# Altium PCB FuzzyWasp-2.PcbDoc
Units mil, origin at the board's own origin, x right, y up, seen from the top; angles counter-clockwise.
Board outline 3346.46 x 3346.46 mil, 2 copper layers (Top Layer, Bottom Layer), stack 12.8 mil thick; 93 components, 75 nets, 320 pads, 156 vias.
Unrouted connection lines stored in the file: 3.
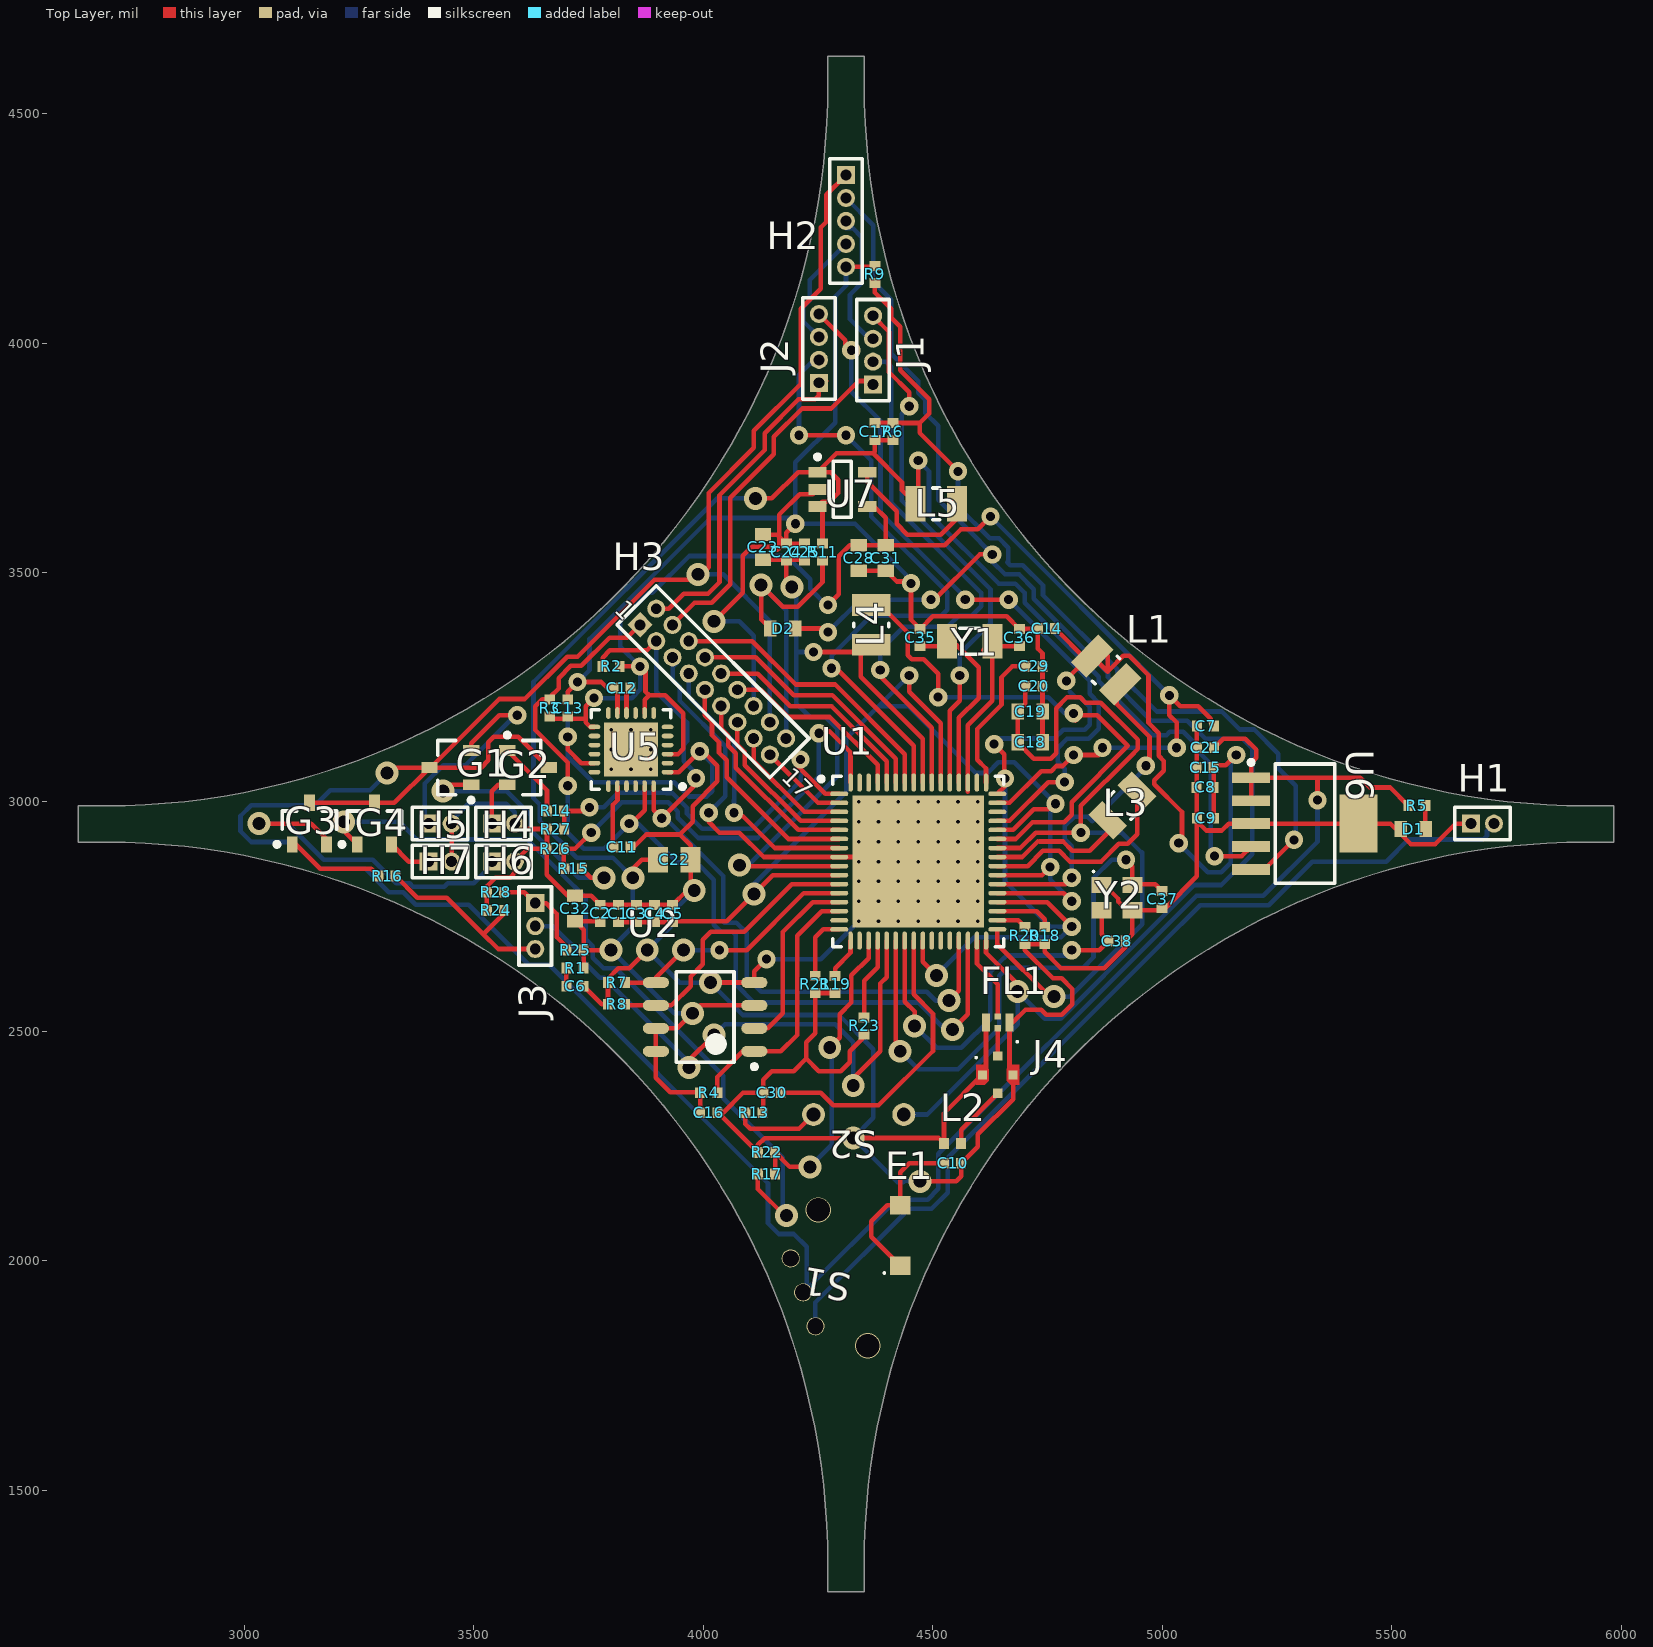
[diagram p0: Top Layer view]
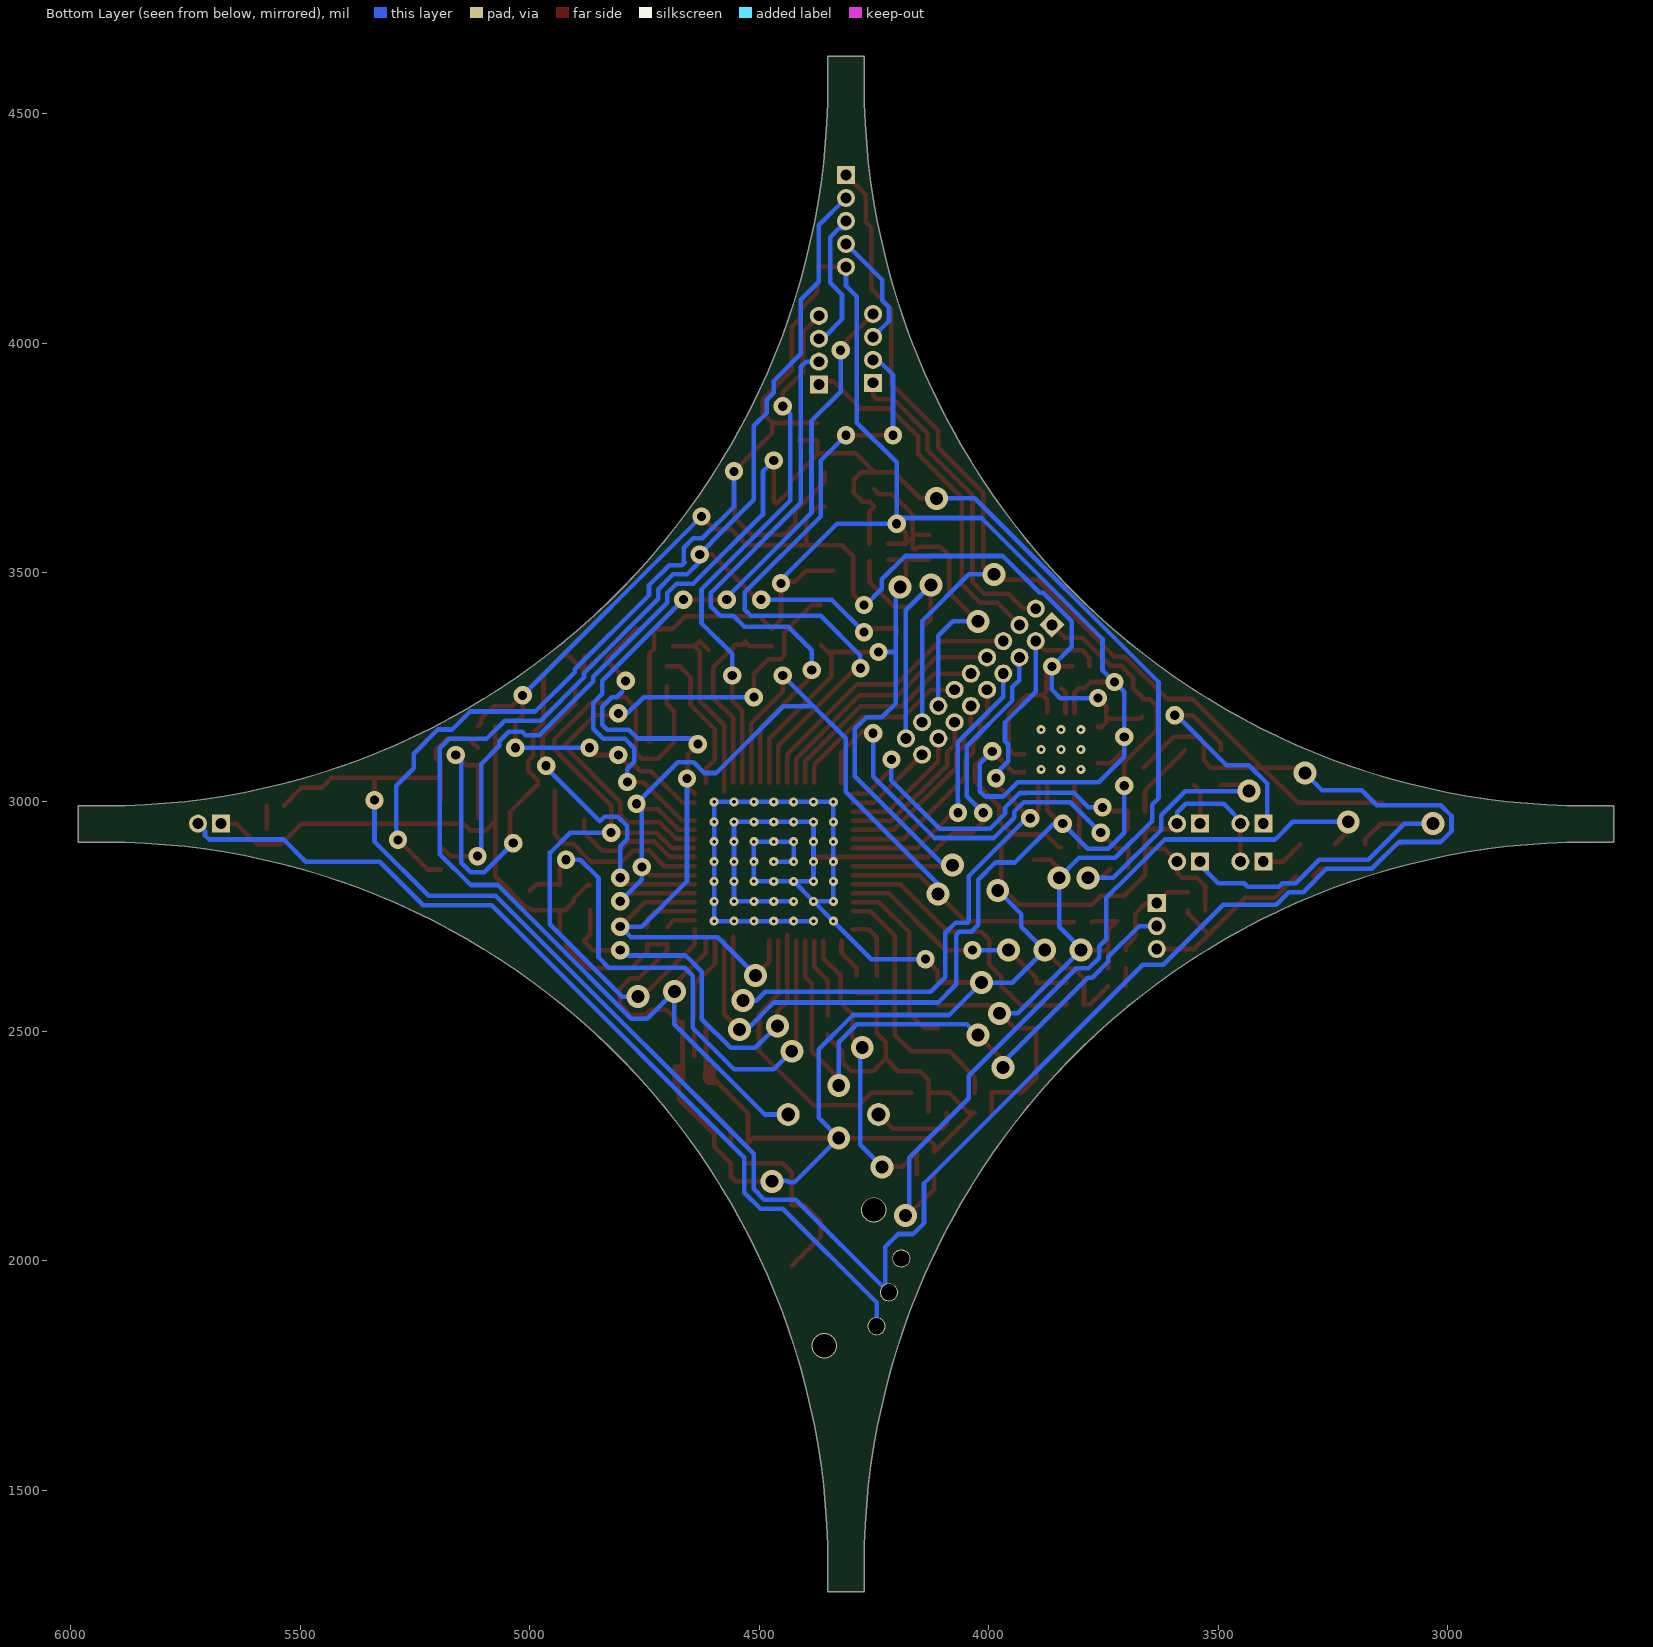
[diagram p1: Bottom Layer view, seen from below]

## Layer stack, top to bottom
Top Solder: solder mask 0.4, Solder Resist, Dk 3.5
Top Layer: signal copper 1.4
Dielectric 1: core 10, FR-4, Dk 4.2
Bottom Layer: signal copper 1.4
Bottom Solder: solder mask 0.4, Solder Resist, Dk 3.5

## Board outline
2696.85,2912.56 cw(c2696.85,1337.76) 4271.65,1337.76 4271.65,1278.7 4350.39,1278.7 4350.39,1337.76 cw(c5925.2,1337.76) 5925.2,2912.56 5984.25,2912.56 5984.25,2991.3 5925.2,2991.3 cw(c5925.2,4566.1) 4350.39,4566.1 4350.39,4625.16 4271.65,4625.16 4271.65,4566.1 cw(c2696.85,4566.1) 2696.85,2991.3 2637.8,2991.3 2637.8,2912.56

## Design rules (kind name [scope] priority, off if disabled: settings)
Clearance [All] p1: gap=10
PolygonConnect [All] p1: connectstyle=Relief reliefconductorwidth=10 reliefentries=4 polygonreliefangle="90 Angle" airgapwidth=10
RoomDefinition Kernal2 [InComponentClass('Kernal2')] p1: confinementstyle=ConfineIn formatcopy=TRUE lockcomponents=FALSE outline 6027.55,1338.58 9220.47,1338.58 9220.47,2043.3 6027.55,2043.3
RoutingVias [All] p1: holewidth=28 width=50 viastyle="Through Hole" minholewidth=28 minwidth=50 maxholewidth=28 maxwidth=50
SolderMaskExpansion [All] p1: expansion=4
Width [All] p1: maxlimit=10 minlimit=10 preferedwidth=10
30 further rules are at their usual default settings.

## Components (designator, comment, footprint, x,y, rotation, side; value= is the part's Value field where it differs from the comment)
C1 "4.7UF" 0402 3814.96,2756.84 r270 top
C2 "4.7UF" 0402 3775.59,2756.89 r270 top
C3 "4.7UF" 0402 3854.33,2756.84 r270 top
C4 "0.1UF" 0402 3893.7,2756.84 r270 top
C5 "0.1UF" 0402 3933.07,2756.84 r270 top
C6 "0.1UF" 0402 3720.47,2598.43 r180 top
C7 "10PF" 0402 5094.49,3165.35 r180 top
C8 "10UF" 0402 5093.5,3031.5 r0 top
C9 "0.1UF" 0402 5094.49,2964.57 r0 top
C10 "1PF" 0402 4543.31,2212.6 r180 top
C11 "2.2UF" 0402 3822.83,2901.57 r180 top
C12 "0.1UF" 0402 3822.83,3248.03 r0 top
C13 "0.1UF" 0402 3704.72,3204.72 r270 top
C14 "0.1UF" 0402 4748.03,3377.95 r0 top
C15 "0.1UF" 0402 5093.5,3074.8 r0 top
C16 "0.1UF" 0402 4011.81,2322.83 r180 top
C17 "15PF" 0402 4374.02,3807.09 r270 top
C18 "22UF" 0603 4712.6,3129.92 r180 top
C19 "22UF" 0603 4712.6,3196.85 r180 top
C20 "0.1UF" 0402 4720.47,3251.97 r180 top
C21 "0.1UF" 0402 5094.49,3118.11 r0 top
C22 "10UF" 0805 3937.01,2874.02 r180 top
C23 "10UF" 0603 4129.92,3555.12 r270 top
C24 "0.1UF" 0402 4181.1,3544.29 r270 top
C25 "0.1UF" 0402 4220.47,3544.29 r270 top
C28 "10UF" 0603 4338.58,3531.5 r90 top
C29 "0.1UF" 0402 4720.47,3295.28 r180 top
C30 "0.1UF" 0402 4149.61,2366.14 r0 top
C31 "10UF" 0603 4397.64,3531.5 r90 top
C32 "10UF" 0603 3720.47,2767.72 r270 top
C35 "10PF" 0402 4472.44,3358.27 r270 top
C36 "10PF" 0402 4688.98,3358.27 r270 top
C37 "6.2PF" 0402 5000,2787.4 r90 top
C38 "6.2PF" 0402 4901.57,2696.85 r180 top
D1 "RED" 0603 5547.24,2940.94 r180 top
D2 "RED" 0603 4173.23,3377.95 r0 top
E1 "AH316M245001-T" AH316M245001-T 4429.13,2055.12 r90 top
FL1 "DEA202450BT-1294C1" DEA202450BT-1294C1-H 4641.73,2519.68 r180 top
G1 "Si2302DS" Si2302DS 3618.11,3074.8 r0 top
G2 "Si2302DS" Si2302DS 3448.82,3074.8 r180 top
G3 "Si2302DS" Si2302DS 3141.73,2952.76 r90 top
G4 "Si2302DS" Si2302DS 3283.46,2952.76 r90 top
H1 "Header" MHDR1X2 5673.23,2952.76 r0 top
H2 "Programmer" MHDR1X5 4311.02,4366.14 r270 top
H3 "MHDR2X9" MHDR2X9 3862.2,3385.83 r315 top
H4 "Header" MHDR1X2 3539.37,2952.76 r0 top
H5 "Header" MHDR1X2 3401.57,2952.76 r0 top
H6 "Header" MHDR1X2 3539.37,2870.08 r0 top
H7 "Header" MHDR1X2 3401.57,2870.08 r0 top
J1 "Programmer" MHDR1X4 4370.08,3909.45 r90 top
J2 "Programmer" MHDR1X4 4251.97,3913.39 r90 top
J3 "CONN_HEADER_1x3P_0.100in" MHDR1X3 3633.86,2779.53 r270 top
J4 "MM8030-2610RJ3" MM8030-2610RJ3 4641.73,2405.51 r0 top
L1 "2.2UH" 1008 4877.95,3287.4 r315 top
L2 "3.6NH" 0402 4543.31,2255.91 r0 top
L3 "1.0UH" 1007 4913.39,2992.13 r45 top
L4 "2.2UH" 1008 4366.14,3385.83 r90 top
L5 "10UH" 1007 4507.87,3649.61 r0 top
R1 "100K" 0402 3720.47,2637.8 r0 top
R2 "2.2K" 0402 3799.21,3295.28 r0 top
R3 "2.2K" 0402 3665.35,3204.72 r270 top
R4 "100K" 0402 4011.81,2366.14 r0 top
R5 "270 Ohm" 0402 5555.12,2992.13 r0 top
R6 "51K" 0402 4413.39,3807.09 r270 top
R7 "100K" 0402 3811.02,2606.3 r180 top
R8 "100K" 0402 3811.02,2559.06 r180 top
R9 "30.1K" 0402 4374.02,4149.61 r270 top
R11 "100K" 0402 4259.84,3544.29 r90 top
R13 "100" 0402 4110.24,2322.83 r0 top
R14 "100" 0402 3678.15,2980.32 r180 top
R15 "100" 0402 3716.54,2854.33 r0 top
R16 "100" 0402 3311.02,2838.58 r180 top
R17 "100" 0402 4137.8,2188.98 r180 top
R18 "100K" 0402 4744.09,2708.66 r90 top
R19 "100K" 0402 4287.4,2602.36 r270 top
R20 "100K" 0402 4700.79,2708.66 r90 top
R21 "100K" 0402 4244.09,2602.36 r270 top
R22 "100K" 0402 4137.8,2236.22 r180 top
R23 "100K" 0402 4350.39,2511.81 r270 top
R24 "100K" 0402 3547.24,2763.78 r180 top
R25 "270" 0402 3720.47,2677.17 r0 top
R26 "100K" 0402 3677.17,2897.64 r180 top
R27 "100K" 0402 3678.15,2940.94 r180 top
R28 "2.7K" 0402 3547.24,2803.15 r0 top
S1 "SC12P" SC12P 4358.27,1814.96 r110 top
S2 "EVQ-11A04M" EVQ-11 4338.58,2318.9 r180 top
U1 "CC3200" CC3200 4468.5,2870.08 r0 top
U2 "W25Q80BLSNIG" W25Q80BLSNIG 4003.94,2531.5 r180 top
U5 "MPU9150" MPU9150 3842.52,3114.17 r180 top
U6 "TPS79601" TPS79601 5311.02,2952.76 r0 top
U7 "TPS61097" TPS61097A-33 4303.15,3681.1 r0 top
Y1 "CRYSTAL_32.768KHZ_SMD" ABS07 4580.71,3350.39 r180 top
Y2 "Q24FA20H00396" FA20H 4901.57,2791.34 r0 top

## Footprints (in the part's own frame and the unit in brackets; to place one, negate y for a bottom-side part, rotate by r counter-clockwise, add the part's x,y. Pads: shape width x height; smd on the part's side, far side on the other; paste and mask are expansions set on the pad)
0402 [mm]
  rect 0.55x0.6 smd: 1(-0.475,0) 2(0.475,0)
  body extent -0.53,-0.28 0.53,0.27, height 0.55
0603 [mm]
  rect 0.7x0.9 smd: 1(-0.7,0) 2(0.7,0)
  body extent -0.83,-0.43 0.82,0.42, height 0.85
0805 [mm]
  rect 1.1x1.4 smd: 1(-0.9,0) 2(0.9,0)
  body extent -1.05,-0.67 1.05,0.67, height 1.25
1007 [mm] "Chip Diode, 2-Leads, Body 2.50x1.80mm, IPC Medium Density"
  rect 1.1x1.95 smd: 1(-1.15,0) 2(1.15,0)
  silkscreen extent -0.2,-0.87 0.2,0.87, body extent -1.3,-0.95 1.3,0.95, height 1.9
1008 [mm] "Chip Diode, 2-Leads, Body 2.50x2.00mm, IPC Medium Density"
  rect 1.2x2.15 smd: 1(-1.1,0) 2(1.1,0)
  silkscreen extent -0.1,-0.98 0.1,0.97, body extent -1.3,-1.05 1.3,1.05, height 1
ABS07 [mm] "Chip Diode, 2-Leads, Body 3.20x1.50mm, IPC Medium Density"
  rect 1.1x1.9 smd: 1(-1.25,0) 2(1.25,0)
  silkscreen extent -0.55,-0.72 0.55,0.72, body extent -1.65,-0.8 1.65,0.8, height 1.9
AH316M245001-T [mm] "ANT BLUETOOTH W-LAN ZIGBEE WIMAX"
  rect 1x1.15 smd: 1(-1.675,0) 2(1.675,0)
  silkscreen extent -2.12,0.82 -2.03,0.92, body extent -1.68,-0.87 1.68,0.87, height 0.6
CC3200 [mm] "QFN, 64-Leads, Body 9.00x9.00mm, Pitch 0.50mm, Thermal Pad 7.30x7.30mm, IPC Medium Density"
  oval 1x0.25 smd: 1(-4.375,3.75) 2(-4.375,3.25) 3(-4.375,2.75) 4(-4.375,2.25) 5(-4.375,1.75) 6(-4.375,1.25) 7(-4.375,0.75) 8(-4.375,0.25) 9(-4.375,-0.25) 10(-4.375,-0.75) 11(-4.375,-1.25) 12(-4.375,-1.75) 13(-4.375,-2.25) 14(-4.375,-2.75) 15(-4.375,-3.25) 16(-4.375,-3.75) 33(4.375,-3.75) 34(4.375,-3.25) 35(4.375,-2.75) 36(4.375,-2.25) 37(4.375,-1.75) 38(4.375,-1.25) 39(4.375,-0.75) 40(4.375,-0.25) 41(4.375,0.25) 42(4.375,0.75) 43(4.375,1.25) 44(4.375,1.75) 45(4.375,2.25) 46(4.375,2.75) 47(4.375,3.25) 48(4.375,3.75)
  oval 0.25x1 smd: 17(-3.75,-4.375) 18(-3.25,-4.375) 19(-2.75,-4.375) 20(-2.25,-4.375) 21(-1.75,-4.375) 22(-1.25,-4.375) 23(-0.75,-4.375) 24(-0.25,-4.375) 25(0.25,-4.375) 26(0.75,-4.375) 27(1.25,-4.375) 28(1.75,-4.375) 29(2.25,-4.375) 30(2.75,-4.375) 31(3.25,-4.375) 32(3.75,-4.375) 49(3.75,4.375) 50(3.25,4.375) 51(2.75,4.375) 52(2.25,4.375) 53(1.75,4.375) 54(1.25,4.375) 55(0.75,4.375) 56(0.25,4.375) 57(-0.25,4.375) 58(-0.75,4.375) 59(-1.25,4.375) 60(-1.75,4.375) 61(-2.25,4.375) 62(-2.75,4.375) 63(-3.25,4.375) 64(-3.75,4.375)
  rect 7.3x7.3 smd: 65(0,0)
  silkscreen extent -5.5,-4.72 4.72,4.72, body extent -4.57,-4.57 4.57,4.57, height 1
DEA202450BT-1294C1-H [mm] "FILTER BANDPASS 2.45GHZ WLAN SMD"
  rect 0.35x0.35 smd: 1(0,-0.325) 3(0,0.325)
  rect 0.45x1 smd: 2(0.65,0) 4(-0.65,0)
  silkscreen extent -1.12,1.03 -1.03,1.12, body extent -0.98,-0.6 0.97,0.6, height 0.8
EVQ-11 [mil]
  round 50 hole 30: 1(-98.43,0) 2(98.43,0)
FA20H [mm] "DFN, 4-Leads, Body 2.00x2.50mm, Pitch 1.70mm, IPC Medium Density"
  rect 1.1x0.9 smd: 1(-0.85,-0.7) 2(0.85,-0.7) 3(0.85,0.7) 4(-0.85,0.7)
  silkscreen extent -1.35,1.4 -1.25,1.5, body extent -1.3,-1.05 1.3,1.05, height 0.55
MHDR1X2 [mm] "Connector; Header; 2 Position"
  rect 1x1 hole 0.6: 1(0,0)
  round 1 hole 0.6: 2(1.27,0)
  silkscreen extent -0.9,-0.9 2.17,0.9
MHDR1X3 [mm] "Connector; Header; 3 Position"
  rect 1x1 hole 0.6: 1(0,0)
  round 1 hole 0.6: 2(1.27,0) 3(2.54,0)
  silkscreen extent -0.9,-0.9 3.44,0.9
MHDR1X4 [mm] "Connector; Header; 4 Position"
  rect 1x1 hole 0.6: 1(0,0)
  round 1 hole 0.6: 2(1.27,0) 3(2.54,0) 4(3.81,0)
  silkscreen extent -0.9,-0.9 4.71,0.9
MHDR1X5 [mm] "Connector; Header; 5 Position"
  rect 1x1 hole 0.6: 1(0,0)
  round 1 hole 0.6: 2(1.27,0) 3(2.54,0) 4(3.81,0) 5(5.08,0)
  silkscreen extent -0.9,-0.9 5.98,0.9
MHDR2X9 [mm] "Connector; Header; 9x2 Position"
  rect 1x1 hole 0.6: 1(0,0)
  round 1 hole 0.6: 2(0,1.27) 3(1.27,0) 4(1.27,1.27) 5(2.54,0) 6(2.54,1.27) 7(3.81,0) 8(3.81,1.27) 9(5.08,0) 10(5.08,1.27) 11(6.35,0) 12(6.35,1.27) 13(7.62,0) 14(7.62,1.27) 15(8.89,0) 16(8.89,1.27) 17(10.16,0) 18(10.16,1.27)
  silkscreen extent -0.9,-0.9 11.06,2.17
MM8030-2610RJ3 [mm]
  rect 0.5x0.5 smd: 1(0,1.025) 2(0,-1.025) 4(0.852,-0.017)
  rect 0.5x0.5 smd mask+0.102: 3(-0.853,-0.009)
  Top Layer region: 1.185,0.548 0.715,0.548 0.485,0.318 0.485,-0.322 0.715,-0.552 1.185,-0.552
  Top Layer region: -1.192,-0.559 -0.722,-0.559 -0.492,-0.329 -0.492,0.311 -0.722,0.541 -1.192,0.541
  silkscreen extent -1.25,0.9 -1.15,1, body extent -1.19,-1.27 1.18,1.27, height 1.25
MPU9150 [mm] "QFN, 24-Leads, Body 4.00x4.00mm, Pitch 0.50mm, Thermal Pad 3.00x3.00mm, IPC Medium Density"
  oval 0.65x0.25 smd: 1(-2.025,1.25) 2(-2.025,0.75) 3(-2.025,0.25) 4(-2.025,-0.25) 5(-2.025,-0.75) 6(-2.025,-1.25) 13(2.025,-1.25) 14(2.025,-0.75) 15(2.025,-0.25) 16(2.025,0.25) 17(2.025,0.75) 18(2.025,1.25)
  oval 0.25x0.65 smd: 7(-1.25,-2.025) 8(-0.75,-2.025) 9(-0.25,-2.025) 10(0.25,-2.025) 11(0.75,-2.025) 12(1.25,-2.025) 19(1.25,2.025) 20(0.75,2.025) 21(0.25,2.025) 22(-0.25,2.025) 23(-0.75,2.025) 24(-1.25,2.025)
  rect 3x3 smd: 25(0,0)
  silkscreen extent -2.98,-2.2 2.2,2.2, body extent -2.05,-2.05 2.05,2.05, height 1.1
SC12P [mm]
  round 1 hole 0.9: 1(2,2.35) 2(4,2.35) 3(6,2.35)
Si2302DS [mm] "SOT23, 3-Leads, Body 2.90x2.30mm, Pitch 0.95mm, IPC Medium Density"
  rect 0.9x0.6 smd: 1(-1.15,0.95) 2(-1.15,-0.95) 3(1.15,0)
  silkscreen extent -1.27,-1.5 0.7,1.92, body extent -0.7,-1.5 0.7,1.5, height 1.1
TPS61097A-33 [mm] "SOT23, 5-Leads, Body 2.90x2.80mm, Pitch 0.95mm, IPC Medium Density"
  rect 1x0.6 smd: 1(-1.375,0.95) 2(-1.375,0) 3(-1.375,-0.95) 4(1.375,-0.95) 5(1.375,0.95)
  silkscreen extent -1.5,-1.55 0.5,1.92, body extent -0.88,-1.52 0.87,1.53, height 1.45
TPS79601 [mm] "SOT223, 6-Leads, Body 6.50x7.06mm (avg), Pitch 1.27mm, IPC Medium Density"
  rect 2.1x0.6 smd: 1(-2.975,2.54) 2(-2.975,1.27) 3(-2.975,0) 4(-2.975,-1.27) 5(-2.975,-2.54)
  rect 2.1x3.2 smd: 6(2.975,0)
  silkscreen extent -3.1,-3.3 1.65,3.51, body extent -1.78,-3.27 1.78,3.27, height 1.8
W25Q80BLSNIG [mm] "SOIC, 8-Leads, Body 4.90x3.90mm, Pitch 1.27mm, IPC Medium Density"
  oval 1.45x0.6 smd: 1(-2.725,1.905) 2(-2.725,0.635) 3(-2.725,-0.635) 4(-2.725,-1.905) 5(2.725,-1.905) 6(2.725,-0.635) 7(2.725,0.635) 8(2.725,1.905)
  silkscreen extent -2.85,-2.5 1.6,2.88, body extent -2,-2.5 2,2.5, height 1.75

## Part data
C1: library part CAP_0402, "CAP CER 4.7UF 6.3V 20% X5R 0402"
C2 C3: library part CAP_0402
C4 C5 C6 C9 C12 C13 C14 C15 C16 C20 C21 C24 C25 C29 C30: library part CAP_0402, "CAP CER 0.1UF 10V 10% X5R 0402"
C7: library part CAP_0402, "CAP CER 10PF 50V NP0 0402"
C8: library part CAP_0402, "CAP CER 10UF 6.3V 20% X5R 0603"
C10: library part CAP_0402, "CAP CER 1PF 50V NP0 0402"
C11: library part CAP_0402, "CAP CER 2.2UF 10V 10% X5R 0402"
C17: library part CAP_0402, "CAP CER 15PF 50V 5% NP0 0402"
C18 C19: library part CAP_0603, "CAP CER 22UF 4V 20% X5R 0603"
C22: library part CAP_0805, "CAP CER 10UF 10V 10% X5R 0805"
C23 C28 C31 C32: library part CAP_0603, "CAP CER 10UF 6.3V 20% X5R 0603"
C35 C36: library part CAP_0402, "CAP CER 10PF 50V 1% NP0 0402"
C37 C38: library part CAP_0402, "CAP CER 6.2PF 50V NP0 0402"
D1 D2: library part LED_0603, "LED CHIPLED 633NM RED 0603 SMD"
H1 H4 H5 H6 H7: library part Header2P, "Header, 2-pin"
H2: library part Header5P, "Header 5-pin"
H3: "Header, 9-Pin, Dual row"
J1 J2: library part Header4P, "Header 4-pin"
J3: "Pin Header, THT, Single-row, 2.54mm pitch"
L1 L4: library part INDUCTOR_1008, "INDUCTOR 2.2UH 20% 1300MA 1008"
L2: library part INDUCTOR_0402, "INDUCTOR 3.6NH 0.1NH 0402"
L3: library part INDUCTOR_1007, "INDUCTOR POWER 1.0UH 1007"
L5: library part INDUCTOR_1007, "INDUCTOR POWER 10UH 1007"
R1 R4 R7 R8 R11 R18 R19 R20 R21 R22 R23 R24 R26 R27: library part RES_0402, "RES 100K OHM 1/16W 5% 0402 SMD"
R2 R3: library part RES_0402, "RES 2.2K OHM 1/10W 5% 0402 SMD"
R5: library part RES_0402, "RES 270 OHM 1/10W 5% 0603 SMD"
R6: library part RES_0402, "RES 51K OHM 1/16W 1% 0402"
R9: library part RES_0402, "RES 30.1K OHM 1/16W 1% 0402 SMD"
R13 R14 R15 R16 R17: library part RES_0402, "RES 100 OHM 1/10W 5% 0402 SMD"
R25: library part RES_0402, "RES 270 OHM 1/16W 1% 0402 SMD"
R28: library part RES_0402, "RES 2.70K OHM 1/16W 1% 0402 SMD"

## Via types
v1: diameter 40, hole 20, Top Layer to Bottom Layer, 60 vias
v2: diameter 19.68, hole 7.87, Top Layer to Bottom Layer, 58 vias
v3: diameter 50, hole 28, Top Layer to Bottom Layer, 34 vias
v4: diameter 40, hole 20, Top Layer to Bottom Layer, tented bottom, 2 vias
v5: diameter 55.12, hole 51.18, Top Layer to Bottom Layer, 2 vias

## Nets (pads, with @x,y where several pads share a name; then routed paths per layer and width w, separated by ;. In a path a pad name is that pad's centre, name@x,y a point inside that pad or via, vN(x,y) a via of type N, cw(c..) or ccw(c..) an arc to the next point about the centre after c; other vN are vias at no path point)
CC_NRESET: D2.2 H2.2 S2.1 U1.32 | length 3644.6
  Top Layer w10: D2.2@4200.79,3366.14 D2.2 4263.78,3377.95 v1(4271.65,3370.08) ; v1@4500,3437.01 4602.35,3539.36 v1(4629.91,3539.36) ; U1.32 4616.14,2671.26 4685.04,2602.36 v3(4685.04,2586.61)
  Bottom Layer w10: v1(4271.65,3370.08) 4342.51,3440.94 v1(4496.05,3440.94) ; H2.2 4370.08,4257.09 4370.08,4133.86 4409.45,4094.49 4409.45,3976.38 4468.5,3917.32 4468.5,3892.02 4483.82,3876.7 4483.82,3847.71 4511.81,3819.72 4511.81,3658.44 4603.32,3566.93 4603.32,3565.95 v1(4629.91,3539.36) 4629.91,3523.63 4657.6,3495.94 4688.14,3495.94 4720.35,3463.73 4720.35,3442.51 4882.08,3280.79 4882.08,3271.47 4976.38,3177.17 5055.12,3177.17 5094.49,3137.8 5175.48,3137.8 5196.42,3116.86 5196.42,2886.35 5128.96,2818.9 5070.14,2818.9 4970.05,2718.81 4778.8,2527.56 4744.09,2527.56 v3(4685.04,2586.61) 4685.04,2515.75 4488.19,2318.9 S2.1
GND: C1.1 C2.1 C3.1 C4.1 C5.1 C6.1 C7.2 C8.1 C9.1 C10.1 C10.2 C11.1 C12.1 C13.1 C14.1 C15.1 C16.1 C18.1 C19.1 C20.1 C21.1 C22.1 C23.1 C24.1 C25.1 C28.1 C29.1 C30.1 C31.1 C32.1 C35.1 C36.1 C37.1 C38.1 D1.2 E1.1 E1.2 FL1.2 FL1.4 H1.1 H2.5 H3.14 H4.2 H5.2 H6.2 H7.2 J4.3 J4.4 L2.1 R7.2 R8.2 R9.1 R13.2 R18.1 R19.2 R20.1 R21.2 R22.2 R23.2 R24.2 R26.2 R27.2 R28.1 U1.65 U2.4 U5.1 U5.11 U5.15 U5.17 U6.3 U6.6 U7.2 Y2.2 Y2.4 | length 14044.6
  Top Layer w10: H7.2 H5.2 ; R24.2 R28.1 3528.54,2815.94 3547.24,2834.65 3578.74,2834.65 3589.37,2845.28 H6.2 3616.93,2897.64 R26.2 3658.46,2841.54 3704.72,2795.28 C32.1 3755.91,2795.28 C2.1 3775.64,2775.54 C1.1 C3.1 C4.1 C5.1 3964.62,2807.09 v3(3980.32,2807.09) 3972.44,2814.96 C22.1 3972.44,2905.51 3948.82,2929.13 ; H4.2 3601.18,2940.94 R27.2 R26.2@3659.45,2898.62 ; v1(3704.72,3141.73) 3704.72,3114.17 3734.25,3084.65 3746.43,3084.65 ; C13.1 3704.72,3240.16 v1(3725.94,3261.38) 3777.99,3261.38 3791.34,3248.03 C12.1 3812.99,3239.17 U5.11 ; C6.1 3778.54,2559.06 R8.2 R7.2 3792.32,2615.16 3814.33,2637.17 3815.78,2637.17 3816.41,2637.8 3838.58,2637.8 v3(3877.95,2677.17) ; 3746.06,3084.65 U5.17 ; C11.1@3842.52,2901.57 3847.91,2901.57 3875.47,2929.13 3948.82,2929.13 ; U5.1@3922.24,3064.72 3946.61,3064.72 v1(3992.13,3110.24) 3999.37,3110.24 4030.87,3078.74 4030.87,3044.93 3976.81,2990.88 3976.81,2957.13 3948.82,2929.13 ; v3(4015.75,2606.3) 4015.94,2606.5 U2.4 4111.22,2630.91 v1(4137.8,2657.48) ; v3(4023.61,3393.69) 4085.98,3456.06 4085.98,3536.33 4105.99,3556.34 4153.85,3556.34 4160.93,3549.26 4163.08,3551.42 4164.55,3551.42 4165.67,3552.53 4165.67,3626.3 4209.88,3670.51 4238.43,3670.51 U7.2 ; C16.1 C16.1@4032.48,2322.83 ; C23.1 4161.42,3582.68 C24.1 ; R13.2@4130.91,2324.8 C30.1 ; v1(4200.78,3606.29) 4181.1,3586.62 C24.1 ; C25.1 C24.1 ; R19.2 R21.2 4244.09,2496.06 4224.41,2476.38 4224.41,2440.94 ; H2.5 R9.1@4371.85,4166.14 ; C28.1 C31.1 4421.26,3480.31 v1@4456.69,3480.31 ; R23.2 4350.39,2488.19 4318.9,2456.69 4318.9,2433.07 4299.21,2413.39 4251.97,2413.39 4224.41,2440.94 ; E1.1 4366.14,2052.17 4366.14,2086.61 4400.59,2121.06 E1.2 4429.13,2192.91 4448.82,2212.6 C10.2 ; v1(4452.75,3476.37) 4460.64,3476.37 4452.76,3468.49 4452.76,3396.65 C35.1 4500,3404.53 4661.42,3404.53 C36.1 C14.1@4728.35,3376.97 ; v3(4472.44,2173.23) 4551.18,2173.23 4562.01,2184.06 C10.1 4562.55,2212.6 4598.43,2248.47 4598.43,2275.59 4675.26,2352.42 J4.4 4667.32,2412.79 FL1.4 4674.68,2519.68 4702.24,2547.24 4736.46,2547.24 4747.84,2535.87 4780.98,2535.87 4804.41,2559.3 4804.41,2592.43 4780.98,2615.87 4762.09,2615.87 4700.79,2677.17 R20.1 R18.1 4744.09,2673.23 4779.53,2637.8 4874.02,2637.8 4920.28,2684.06 C38.1 4935.04,2711.61 Y2.2 ; FL1.2 4616.14,2413.17 J4.3 4524.61,2321.63 L2.1 4512.8,2267.72 v3(4326.77,2267.72) 4326.46,2267.4 4133.54,2267.4 4119.09,2252.95 R22.2 C16.1@4032.48,2322.83 ; C14.1 4729.33,3333.66 4739.17,3323.82 C29.1 C20.1 C18.1@4739.17,3130.91 ; Y2.4 4874.46,2818.9 4904.76,2788.59 4904.76,2782.24 4923.23,2763.78 Y2.2 ; C8.1@5075.79,3030.51 C9.1 C9.1@5075.79,2958.12 ; C8.1@5075.79,3032.48 C21.1 C7.2 ; H1.1 5639.32,2952.76 5594.8,2908.23 5542.09,2908.23 5497.56,2952.76 U6.6 U6.3 5145.23,2952.76 5130.23,2937.76 5096.15,2937.76 C9.1@5075.79,2958.12 ; C16.1@4032.48,2322.83 4043.31,2322.83 4086.61,2366.14 C30.1 ; C30.1 4130.91,2394.68 4149.61,2413.39 4196.85,2413.39 4224.41,2440.94 ; Y2.2 4995.08,2763.78 C37.1 5006.45,2768.7 5075.79,2838.04 C9.1@5075.79,2958.12
  Bottom Layer w10: H7.2@3451.57,2859.5 H7.2 ; H5.2 3451.57,2959.45 3488.19,2996.06 3570.87,2996.06 3589.37,2977.56 H4.2 ; v3(3980.32,2807.09) 3929.13,2755.91 3929.13,2728.35 v3(3877.95,2677.17) 3948.82,2606.3 v3(4015.75,2606.3) 4086.3,2535.75 4295.69,2535.75 4370.44,2460.99 4370.44,2311.39 v3(4326.77,2267.72) 4423.23,2171.26 4436.08,2171.26 4439.45,2174.63 4456.02,2174.63 4459.39,2171.26 4470.47,2171.26 v3(4472.44,2173.23) ; v1(3992.13,3110.24) 4019.25,3083.11 4019.25,3023.19 4007.87,3011.81 3968.27,3011.81 3936.77,3043.31 3759.84,3043.31 3704.72,3098.43 v1(3704.72,3141.73) 3704.72,3240.16 3751.97,3287.4 3751.97,3355.06 4015.75,3618.84 4192.91,3618.84 4200.78,3610.97 v1(4200.78,3606.29) ; v3(4023.61,3393.69) 4078.2,3393.69 4109.69,3362.2 H3.14 ; v1(4137.8,2657.48) 4255.91,2657.48 v2(4338.58,2740.16) v2(4381.89,2783.46) ; H2.5 4311.02,4125.06 4287.4,4101.43 4287.4,3826.77 4200.78,3740.15 v1(4200.78,3606.29) ; v2(4381.89,2740.16) v2(4425.2,2740.16) v2(4468.5,2740.16) v2(4511.81,2740.16) v2(4555.12,2740.16) v2(4598.43,2740.16) v2(4598.43,2783.46) v2(4598.43,2826.77) v2(4598.43,2870.08) v2(4598.43,2913.39) v2(4598.43,2956.69) v2(4598.43,3000) v2(4555.12,3000) v2(4511.81,3000) v2(4468.5,3000) v2(4425.2,3000) v2(4381.89,3000) v2(4338.58,3000) v2(4338.58,2956.69) v2(4338.58,2913.39) v2(4338.58,2870.08) v2(4338.58,2826.77) v2(4338.58,2783.46) v2(4381.89,2783.46) ; v2(4425.2,2783.46) v2(4468.5,2783.46) v2(4511.81,2783.46) v2(4555.12,2783.46) v2(4555.12,2826.77) v2(4555.12,2870.08) v2(4555.12,2913.39) v2(4555.12,2956.69) v2(4511.81,2956.69) v2(4468.5,2956.69) v2(4425.2,2956.69) v2(4381.89,2956.69) v2(4381.89,2913.39) v2(4381.89,2870.08) v2(4381.89,2826.77) v2(4425.2,2826.77) ; v1(4452.75,3476.37) 4452.75,3484.26 4330.72,3606.29 v1(4200.78,3606.29) ; v2(4468.5,2870.08) v2(4425.2,2870.08) v2(4425.2,2913.39) v2(4468.5,2913.39) v2(4511.81,2913.39) v2(4511.81,2870.08) v2(4511.81,2826.77) v2(4468.5,2826.77) v2(4425.2,2826.77) ; v2(4381.89,2783.46) v2(4425.2,2826.77)
I2C_SCL: H3.1 R3.1 U1.30 U5.23 | length 2110.4
  Top Layer w10: v1(3704.72,3035.43) 3704.72,3085.89 3633.86,3156.76 3633.86,3208.66 3648.62,3223.43 R3.1 3665.35,3227.91 3684.72,3247.28 3684.72,3269.65 3711.45,3296.38 3734.11,3296.38 3796,3358.27 3834.65,3358.27 H3.1 ; v1(3838.58,2952.76) 3842.52,2952.76 3872.05,2982.28 U5.23 ; v3(4543.3,2503.93) 4576.77,2537.4 U1.30
  Bottom Layer w10: v1(3704.72,3035.43) 3704.72,2933.07 3739.72,2898.07 3783.9,2898.07 v1(3838.58,2952.76) 3858.27,2952.76 3942.91,2868.11 3985.5,2868.11 4022.8,2830.8 4022.8,2732.38 4038.01,2717.17 4063.81,2717.17 4070.87,2710.11 4070.87,2602.36 4110.24,2562.99 4468.5,2562.99 4527.56,2503.93 v3(4543.3,2503.93)
I2C_SDA: H3.3 R2.1 U1.29 U5.24 | length 1737.8
  Top Layer w10: R2.1 3780.51,3314.49 3796.29,3330.28 3877.36,3330.28 H3.3 ; U5.24 3891.73,2982.28 v1(3909.45,2964.57) 3984.25,3039.37 v1(3984.25,3051.91) ; v3(4535.43,2566.93) 4557.09,2588.58 U1.29 U1.29@4557.09,2705.71
  Bottom Layer w10: H3.3 3897.56,3240.24 3964.57,3173.23 3964.57,3132.17 3957.13,3124.73 3957.13,3088.3 3984.25,3061.17 v1(3984.25,3051.91) ; v1@3913.39,2968.5 3992.13,2889.76 4043.31,2838.58 4043.31,2740.16 4046.3,2737.17 4072.1,2737.17 4094.49,2714.77 4094.49,2618.11 4125.98,2586.61 4486.74,2586.61 4506.42,2566.93 v3(4535.43,2566.93)
MCU_RESET_OUT: D2.1 H3.18 R11.1 | length 681.7
  Top Layer w10: D2.1 4125.98,3397.64 v3(4125.98,3472.44) 4173.23,3425.2 4206.17,3425.2 4259.84,3478.86 R11.1
  Bottom Layer w10: v3(4125.98,3472.44) 4180.4,3418.02 H3.18
MOTOR1: R14.1 R27.1 U1.1 | length 834.2
  Top Layer w10: R27.1 R14.1 3744.09,2980.32 v1(3751.97,2988.19) ; v1(4212,3092.6) 4204.72,3085.32 4204.72,3078.74 4265.75,3017.72 U1.1
  Bottom Layer w10: v1(3751.97,2988.19) 3782.74,2988.19 3814.24,3019.68 3919.01,3019.68 3919.12,3019.57 3932.23,3019.57 3964.45,2987.35 3964.45,2974.24 3997.31,2941.38 4106.73,2941.38 4212,3046.65 v1(4212,3092.6)
MOTOR2: R15.1 R26.1 U1.64 | length 985.1
  Top Layer w10: R15.1@3695.87,2856.3 R26.1 3720.47,2897.64 v1(3755.91,2933.07) ; v1(4251.96,3149.6) 4255.9,3153.54 4275.59,3153.54 4320.87,3108.27 U1.64
  Bottom Layer w10: v1(3755.91,2933.07) 3822.52,2999.68 3910.49,2999.68 3910.61,2999.57 3923.95,2999.57 3944.45,2979.06 3944.45,2965.73 3988.8,2921.38 4118.23,2921.38 4252,3055.15 v1(4251.96,3149.6) v1(4251.96,3149.6)
MOTOR3: J3.3 R16.1 R24.1 | length 441.3
  Top Layer w10: R16.1 3376.97,2791.34 3440.94,2791.34 3472.44,2759.84 3519.68,2712.6 ; R24.1 3565.94,2757.33 3521.21,2712.6 3519.68,2712.6 ; J3.3 3552.76,2679.53 3519.68,2712.6
MOTOR4: R17.1 R22.1 U1.19 | length 686
  Top Layer w10: R17.1 R22.1 4187.99,2204.72 v3(4232.28,2204.72) ; v3(4275.59,2464.57) 4297.24,2486.22 4297.24,2537.4 4322.83,2562.99 4322.83,2622.05 4360.24,2659.45 U1.19
  Bottom Layer w10: v3(4232.28,2204.72) 4280.16,2252.6 4280.16,2460 v3(4275.59,2464.57)
NetC1_2: C1.2 C3.2 C4.2 C5.2 U1.10 U1.37 U1.39 U1.44 U1.54 | length 2569.6
  Top Layer w10: C1.2 C3.2 C4.2 C5.2 3935.1,2740.16 4051.18,2740.16 v3(4110.24,2799.21) 4151.57,2840.55 U1.10 ; v1(4448.82,3275.59) 4448.82,3240.16 4517.72,3171.26 U1.54 ; U1.37 4785.43,2801.18 v1(4803.15,2783.46) ; U1.39 4738.19,2840.55 v1(4755.91,2858.27) ; U1.44 4675.2,2938.98 4720.47,2984.25 v1@4751.97,2984.25 ; v1@4755.91,2988.19 4763.78,2996.06 v1(4767.72,2996.06)
  Bottom Layer w10: v3(4110.24,2799.21) 4110.24,2820.87 4311.96,3022.59 4311.96,3138.73 4381.89,3208.66 ; v1(4448.82,3275.59) 4381.89,3208.66 ; v1(4803.15,2783.46) 4755.91,2830.71 v1(4755.91,2858.27) 4755.91,2984.25 v1(4767.72,2996.06) 4677.6,3086.18 4642.98,3086.18 4619.79,3062.99 4593.76,3062.99 4448.09,3208.66 4381.89,3208.66
NetC6_2: C6.2 R1.1 | length 39.4
  Top Layer w10: C6.2 R1.1
NetC8_2: C8.2 C9.2 C14.2 C15.2 L1.1 U1.25 U1.36 U1.48 | length 2786
  Top Layer w10: U1.25 4478.35,2651.57 v3(4507.87,2622.05) ; v1(4633.86,3125.98) 4656.26,3103.58 4656.26,3052.4 v1(4657.48,3051.18) ; U1.36 4750,2781.5 v1(4803.15,2728.35) ; U1.48 4657.48,3034.45 v1@4657.48,3047.24 ; C14.2 4834.53,3310.15 4791.33,3266.94 v1(4791.33,3263.77) ; L1.1 4881.27,3284.09 4881.27,3318.41 ; 4881.27,3288.03 4885.2,3288.03 4915.59,3318.41 4928.01,3318.41 4970.21,3276.22 4970.21,3172.25 4992.44,3150.02 4992.44,3100.35 5003.5,3089.28 5003.5,3068.18 4983,3047.68 4983,3038.38 5043.31,2978.07 5043.31,2917.32 v1(5036.27,2910.29) ; C9.2@5112.2,2965.55 C8.2 C15.2 5112.2,3079.57 5138.62,3079.57 v1(5161.42,3102.36)
  Bottom Layer w10: v3(4507.87,2622.05) 4590.55,2704.72 4779.53,2704.72 v1(4803.15,2728.35) 4755.91,2728.35 4657.48,2826.77 v1(4657.48,3051.18) ; v1(4633.86,3125.98) 4646.1,3138.23 4765.17,3138.23 4784.3,3157.36 4831.54,3157.36 4842.09,3167.9 4842.09,3207.39 4821.57,3227.91 4810.6,3227.91 4798.78,3239.72 ; v1(5036.27,2910.29) 5099.68,2846.89 5128.67,2846.89 5149.17,2867.39 v1@5149.17,3090.12
NetC11_2: C11.2 U5.20 | length 137
  Top Layer w10: C11.2@3803.15,2901.57 3803.15,2994.09 3812.99,3003.94 U5.20
NetC12_2: C12.2 U5.10 | length 57.8
  Top Layer w10: U5.10 3832.68,3239.17 C12.2
NetC17_1: C17.1 R6.1 R9.2 U6.5 | length 1955.7
  Top Layer w10: C17.1 R6.1 4471.46,3825.79 ; R9.2 4374.02,4110.24 4409.45,4074.8 4409.45,4055.12 4429.13,4035.43 4429.13,3940.94 4492.13,3877.95 4492.13,3846.46 4471.46,3825.79 ; v1(4555.12,3720.47) 4471.46,3804.13 4471.46,3825.79 ; U6.5 5222.83,2852.76 v1(5287.4,2917.32)
  Bottom Layer w10: v1(4555.12,3720.47) 4555.12,3643.42 4624.17,3574.36 4644.41,3574.36 4664.91,3553.86 4664.91,3524.87 4662.54,3522.5 4669.09,3515.94 4696.42,3515.94 4740.35,3472.01 4740.35,3450.8 4902.08,3289.07 4902.08,3282.96 4987.87,3197.17 5129.61,3197.17 5168.98,3157.8 5200.47,3157.8 5252.95,3105.31 5252.95,3073.82 5291.34,3035.43 v1@5291.34,2921.26
NetC18_2: C18.2 C19.2 C20.2 U1.33 U1.42 | length 1776.4
  Top Layer w10: U1.33@4640.75,2722.2 4640.75,2689.96 4755.91,2574.8 4756.97,2575.87 v3(4764.41,2575.87) ; U1.42 4690.94,2899.61 4724.41,2933.07 v1(4822.83,2933.07) 4822.83,2991.4 4931.41,3099.98 4947.27,3115.83 4947.27,3135.41 4866.14,3216.54 4832.95,3216.54 4821.57,3227.91 4792.58,3227.91 4768.94,3204.26 4768.94,3105.99 4757.43,3094.49 4720.47,3094.49 C18.2 C19.2 4701.77,3213.58 C20.2
  Bottom Layer w10: v3(4764.41,2575.87) 4798.82,2575.87 4956.69,2733.73 4956.69,2889.76 4955.01,2889.76 4911.7,2933.07 v1(4822.83,2933.07)
NetC23_2: C23.2 C24.2 C25.2 L4.1 U1.9 U1.56 | length 1652.8
  Top Layer w10: v3(4078.73,2862.2) 4076.77,2860.24 U1.9 ; C23.2 C25.2@4218.5,3527.56 ; C24.2 4181.1,3480.31 v3(4192.91,3468.5) ; v1(4240.16,3326.77) L4.1@4350.39,3326.77 ; L4.1 L4.1@4350.39,3326.77 ; U1.56 4478.35,3137.8 4343.5,3272.64 4343.5,3319.88 L4.1@4350.39,3326.77
  Bottom Layer w10: v3(4078.73,2862.2) 4098.42,2862.2 4291.96,3055.74 4291.96,3159.1 4266.46,3184.6 4232.72,3184.6 4202.84,3214.48 4202.84,3326.77 ; v3(4192.91,3468.5) 4202.84,3458.57 4202.84,3326.77 ; v1(4240.16,3326.77) 4202.84,3326.77
NetC29_2: C29.2 U1.49 | length 321.2
  Top Layer w10: U1.49 4616.14,3072.83 4596.77,3092.2 4596.77,3159.04 4649.92,3212.19 4649.92,3271.97 4673.23,3295.28 C29.2
NetC30_2: C30.2 U1.24 | length 650.8
  Top Layer w10: C30.2 4255.91,2366.14 4283.46,2338.58 4381.89,2338.58 4500.63,2457.32 4500.63,2538.74 4458.66,2580.71 U1.24
NetC35_2: C35.2 U1.52 Y1.2 | length 429.6
  Top Layer w10: C35.2 4520.67,3339.57 Y1.2 4531.5,3342.52 4551.18,3342.52 4600.39,3293.31 4600.39,3226.38 4557.09,3183.07 U1.52
NetC36_2: C36.2 U1.51 Y1.1 | length 434.8
  Top Layer w10: 4576.77,3022.64 U1.51 4576.77,3167.32 4629.92,3220.47 4629.92,3328.74 Y1.1@4640.75,3339.57 ; Y1.1@4610.24,3330.71 Y1.1 Y1.1@4640.75,3339.57 ; C36.2 Y1.1@4640.75,3339.57
NetC37_2: C37.2 U1.22 Y2.3 | length 1243.1
  Top Layer w10: U1.22 4419.29,2466.54 v3(4429.13,2456.69) ; v1(4921.26,2874.02) 4935.04,2860.24 Y2.3@4935.04,2820.87 ; Y2.3 Y2.3@4935.04,2820.87 ; C37.2 4985.24,2820.87 Y2.3@4935.04,2820.87
  Bottom Layer w10: v3(4429.13,2456.69) 4468.5,2417.32 4555.12,2417.32 4645.04,2507.24 4645.04,2621.42 4662.66,2639.04 4828.02,2639.04 4850.39,2661.42 4850.39,2834.65 4889.76,2874.02 v1(4921.26,2874.02)
NetC38_2: C38.2 U1.23 Y2.1 | length 878.8
  Top Layer w10: U1.23@4438.98,2709.65 U1.23 4438.98,2564.96 4460.63,2543.31 v3(4460.63,2511.81) ; v1(4803.15,2677.17) 4863.19,2677.17 C38.2 4868.11,2711.61 Y2.1
  Bottom Layer w10: v3(4460.63,2511.81) 4508.51,2463.93 4562.36,2463.93 4625.04,2526.61 4625.04,2629.7 4654.38,2659.04 4655.1,2659.04 4661.42,2665.35 4791.34,2665.35 v1(4803.15,2677.17)
NetD1_1: D1.1 R5.2 | length 50.2
  Top Layer w10: D1.1@5573.82,2941.93 R5.2
NetFL1_1: FL1.1 U1.31 | length 184.1
  Top Layer w10: U1.31 4596.46,2647.64 4641.73,2602.36 FL1.1
NetFL1_3: FL1.3 J4.1 | length 61
  Top Layer w10: J4.1 FL1.3
NetG1_1: G1.1 R14.2 | length 167.8
  Top Layer w10: G1.1 3659.45,3025.59 R14.2
NetG1_2: G1.2 H4.1 | length 90.4
  Top Layer w10: H4.1 3539.37,3023.62 3553.15,3037.4
NetG2_1: G2.1 R15.2 | length 570.7
  Top Layer w10: v3(3433.07,3023.62) 3446.85,3037.4 G2.1 ; R15.2 3754.92,2834.65 v3(3783.46,2834.65)
  Bottom Layer w10: v3(3433.07,3023.62) 3571.59,3023.62 3624.06,2971.16 3624.06,2938.94 3728.35,2834.65 v3(3783.46,2834.65)
NetG2_2: G2.2 H5.1 | length 496.5
  Top Layer w10: G2.2 3494.09,3127.95 3555.12,3188.98 v1(3594.49,3188.98)
  Bottom Layer w10: H5.1 3393.07,2952.76 3393.07,3040.19 3433.07,3080.19 3481.77,3080.19 v1@3590.55,3188.98
NetG3_1: G3.1 R16.2 | length 216.5
  Top Layer w10: G3.1 3112.2,2907.48 3165.35,2854.33 3276.57,2854.33 R16.2
NetG3_2: G3.2 H6.1 | length 765.3
  Top Layer w10: v3(3031.5,2952.76) 3145.67,2952.76 3179.13,2919.29 G3.2
  Bottom Layer w10: v3(3031.5,2952.76) 3094.49,2952.76 3173.23,2874.02 3279.53,2874.02 3330.71,2822.83 3359.95,2822.83 3367.39,2815.39 3435.76,2815.39 3443.2,2822.83 3500,2822.83 3539.37,2862.2 H6.1
NetG4_1: G4.1 R17.2 | length 1664.3
  Top Layer w10: v3(3216.53,2956.69) 3216.54,2937.01 G4.1 ; R17.2 4119.09,2156.5 v3@4179.13,2096.46
  Bottom Layer w10: v3(3216.53,2956.69) 3337.06,2956.69 3375.68,2918.07 3616.64,2918.07 3720.06,2814.65 3720.79,2814.65 3744.09,2791.34 3744.09,2700.79 3759.21,2685.67 3759.21,2660.6 3782.64,2637.17 3809.17,2637.17 4043.31,2403.03 4043.31,2354.33 4173.23,2224.41 4173.23,2106.3 v3(4181.1,2098.43)
NetG4_2: G4.2 H7.1 | length 96.2
  Top Layer w10: G4.2 3358.27,2870.08 H7.1
NetH1_2: H1.2 S1.1 | length 2026.9
  Bottom Layer w10: S1.1@4244.4,1870.38 S1.1 4244.4,1909.18 4448.45,2113.23 4497.29,2113.23 4532.44,2148.38 4532.44,2224.63 4998.34,2690.53 5083.09,2775.28 5231.97,2775.28 5326.77,2870.08 5488.19,2870.08 5536.18,2918.07 5699.13,2918.07 5707.91,2926.86 5707.91,2937.44 H1.2
NetH2_3: H2.3 J1.3 | length 296.8
  Bottom Layer w10: H2.3 4311.02,4250.83 4325.39,4250.83 4345.71,4230.51 4345.71,4131.46 4319.65,4105.39 4319.65,4052.01 J1.3@4354.33,4017.32
NetH2_4: H2.4 J2.3 | length 256
  Bottom Layer w10: J2.3 4217.28,4048.07 4217.28,4077.75 4232.28,4092.75 4232.28,4137.4 H2.4
NetJ3_1: J3.1 R25.1 R28.2 | length 222
  Top Layer w10: R28.2 3610.24,2803.15 J3.1 3657.48,2779.53 3681.1,2755.91 3681.1,2704.72 3701.77,2684.06 R25.1
NetJ3_2: J3.2 U1.21 | length 1354.4
  Top Layer w10: v3(3968.5,2421.26) 3968.5,2437.01 v3(4023.62,2492.13) ; v3(4326.77,2381.89) 4326.77,2397.64 4385.83,2456.69 4385.83,2604.33 4399.61,2618.11 U1.21
  Bottom Layer w10: J3.2 3672.05,2729.53 3739.21,2662.36 3739.21,2652.31 3774.36,2617.17 3784.41,2617.17 3968.5,2433.07 v3(3968.5,2421.26) v3@3952.76,2421.26 ; v3(4023.62,2492.13) 4047.24,2515.75 4287.4,2515.75 4326.77,2476.38 v3(4326.77,2381.89)
NetJ4_2: J4.2 L2.2 | length 142.3
  Top Layer w10: L2.2 4562.01,2285.43 J4.2
NetL1_2: L1.2 U1.38 | length 762.7
  Top Layer w10: U1.38 4789.37,2820.87 v1(4803.15,2834.65) ; L1.2@4900.7,3248.9 4900.7,3213.47 4972.44,3141.73 4972.44,3086.61 4970.09,3088.97 4964.56,3083.44 v1(4964.56,3078.73)
  Bottom Layer w10: v1(4803.15,2834.65) 4803.15,2903.26 4787.83,2918.57 4787.83,2947.57 4808.34,2968.07 4837.33,2968.07 4847.58,2957.82 v1@4970.47,3080.71 ; v1(4964.56,3078.73) 4964.56,3084.01 4969.52,3088.97 v1@4975.81,3082.68
NetL3_1: L3.1 U1.41 | length 301.9
  Top Layer w10: U1.41 4694.88,2879.92 4728.66,2913.7 ; 4733.32,2913.7 4783.87,2913.7 4803.87,2893.7 4842.52,2893.7 4881.37,2932.55 L3.1
NetL3_2: L3.2 U1.40 | length 447.5
  Top Layer w10: U1.40 4706.69,2860.24 4740.16,2893.7 4775.59,2893.7 4799.21,2870.08 4866.84,2870.08 4905.77,2909.02 4924.76,2909.02 4945.4,2929.65 L3.2
NetL4_2: L4.2 U1.43 | length 1129.4
  Top Layer w10: L4.2 4385.83,3429.13 4445.63,3369.33 4445.63,3319.34 4453.94,3311.02 4480.31,3311.02 4511.81,3279.53 v1(4511.81,3228.35) ; U1.43 4681.1,2919.29 4717.52,2955.71 4786.42,2955.71 4802.83,2972.13 4802.83,2999.68 4925.2,3122.05 4858.27,3188.98 4822.83,3188.98 v1@4811.02,3177.17
  Bottom Layer w10: v1(4511.81,3228.35) 4751.97,3228.35 4787.41,3192.91 v1(4807.08,3192.91)
NetL5_2: L5.2 U7.5 | length 326.4
  Top Layer w10: U7.5 4357.28,3697.83 4421.26,3633.86 4421.26,3606.3 4444.88,3582.68 4517.51,3582.68 4553.15,3618.32 L5.2
NetR13_1: R13.1 S2.2 | length 190.8
  Top Layer w10: R13.1 4091.54,2298.23 4102.36,2287.4 4208.66,2287.4 S2.2
NetR18_2: R18.2 U1.35 | length 127.4
  Top Layer w10: U1.35 4726.38,2761.81 4744.09,2744.09 R18.2
NetR19_1: R19.1 U1.17 | length 90.6
  Top Layer w10: R19.1 4287.4,2637.8 4320.87,2671.26 U1.17
NetR20_2: R20.2 U1.34 | length 66.2
  Top Layer w10: U1.34 4686.02,2742.13 R20.2
NetR21_1: R21.1 U1.16 | length 143.2
  Top Layer w10: R21.1 4244.09,2704.72 4261.81,2722.44 U1.16
NetR23_1: R23.1 U1.20 | length 175.6
  Top Layer w10: R23.1@4350.39,2534.45 4350.39,2610.24 4379.92,2639.76 U1.20
PCLK: H3.4 J1.1 | length 774.3
  Top Layer w10: H3.4 3980.78,3433.69 4018.55,3433.69 4059.06,3474.2 4059.06,3662.87 4153.86,3757.67 4153.86,3795.59 4215.72,3857.45 4278.71,3857.45 4338.58,3917.32 J1.1@4354.33,3917.32
PDATA_4: H3.12 U1.61 | length 411.8
  Top Layer w10: H3.12 4125.67,3244.41 4185.04,3185.04 4275.59,3185.04 4379.92,3080.71 U1.61
PDATA_5: H3.10 U1.60 | length 486.1
  Top Layer w10: H3.10 4118.6,3279.76 4189.7,3208.66 4279.53,3208.66 4399.61,3088.58 U1.60
PDATA_6: H3.8 U1.59 | length 559.2
  Top Layer w10: H3.8 4114.02,3315.12 4196.85,3232.28 4281.5,3232.28 4419.29,3094.49 U1.59
PDATA_7: H3.6 U1.58 | length 635.6
  Top Layer w10: H3.6@3968.94,3349.8 H3.6 4106.95,3350.47 4201.51,3255.91 4287.4,3255.91 4438.98,3104.33 U1.58
PDATA_8: H3.11 U1.5 | length 429.1
  Top Layer w10: H3.11 4038.98,3160 4054.34,3144.64 4054.34,3122.83 4070.87,3106.3 4070.87,3074.8 4206.69,2938.98 U1.5
PDATA_9: H3.9 U1.6 | length 536.6
  Top Layer w10: H3.9@4004.3,3233.58 4014.46,3233.58 H3.9 4003.63,3189.29 4018.98,3173.93 4018.98,3145.28 4034.34,3129.92 4034.34,3107.08 4050.87,3090.55 4050.87,3053.78 4185.04,2919.61 ; 4185.04,2919.29 U1.6
PDATA_10: H3.7 U1.7 | length 605.9
  Top Layer w10: v1(4066.93,2976.38) 4074.8,2968.5 4086.61,2968.5 4155.51,2899.61 U1.7
  Bottom Layer w10: H3.7 3968.27,3229.3 4067.56,3130.02 4067.56,3003.84 4066.93,3003.21 v1(4066.93,2976.38)
PDATA_11: H3.5 U1.8 | length 828.1
  Top Layer w10: v1(4011.81,2976.38) 4011.81,2956.69 4035.43,2933.07 4078.74,2933.07 4131.89,2879.92 U1.8 4378.94,2879.92
  Bottom Layer w10: H3.5 3943.74,3304.29 3933.59,3294.13 3933.59,3265.39 3948.27,3250.71 3948.27,3221.02 4047.56,3121.73 4047.56,3012.13 v1(4011.81,2976.38)
PHS: H3.13 U1.4 | length 356.3
  Top Layer w10: H3.13 4074.34,3124.64 4090.36,3108.62 4090.36,3080.33 4212.03,2958.66 U1.4
PIN_11: R8.1 U1.11 U2.6 | length 620.8
  Top Layer w10: R8.1 3832.28,2556.5 U2.6 3930.51,2556.5 3972.44,2598.43 3972.44,2619.56 3999.18,2646.3 3999.18,2699.97 4016.38,2717.17 4089.53,2717.17 4192.91,2820.55 ; 4192.91,2820.87 U1.11
PIN_12: R7.1 U1.12 U2.5 | length 553.2
  Top Layer w10: R7.1 U2.5@3896.46,2606.3 ; U2.5 3896.65,2617.13 v3(3956.69,2677.17) ; v1(4035.43,2677.17) 4094.49,2677.17 4218.5,2801.18 U1.12
  Bottom Layer w10: v3(3956.69,2677.17) v1(4035.43,2677.17)
PIN_13: U1.13 U2.2 | length 402.7
  Top Layer w10: U2.2 4140.35,2506.5 4173.23,2539.37 4173.23,2716.54 4238.19,2781.5 U1.13
PIN_14: R4.2 U1.14 U2.1 | length 576.7
  Top Layer w10: R4.2 4030.51,2400.59 4086.42,2456.5 U2.1 4169.09,2456.5 4204.72,2492.13 4204.72,2708.66 4257.87,2761.81 U1.14
PIN_55: J1.2 U1.55 | length 1241.6
  Top Layer w10: v1(4385.83,3287.4) 4385.83,3273.62 4498.03,3161.42 U1.55
  Bottom Layer w10: J1.2 4398.09,3959.45 4409.45,3948.09 4409.45,3651.86 4605.87,3455.44 4605.87,3426.45 4585.36,3405.94 4556.37,3405.94 4532.31,3381.89 4437.01,3381.89 4385.83,3330.71 v1(4385.83,3287.4)
PIN_57: J2.2 U1.57 | length 1412.2
  Top Layer w10: v4(4208.66,3799.21) v4(4311.02,3799.21) ; v1(4279.53,3291.34) 4289.37,3291.34 4458.66,3122.05 U1.57
  Bottom Layer w10: v4(4208.66,3799.21) 4208.66,3930.66 4241.39,3963.39 J2.2 ; v1(4279.53,3291.34) 4279.53,3318.9 4366.14,3405.51 4518,3405.51 4531.5,3419.01 4531.5,3456.69 4366.14,3622.05 4366.14,3744.09 v4(4311.02,3799.21)
PPWRDN: H3.2 J2.1 | length 729.9
  Top Layer w10: H3.2 3925.12,3421.18 3957.63,3453.69 4010.26,3453.69 4035.43,3478.86 4035.43,3668.57 4133.86,3766.99 4133.86,3803.87 4207.43,3877.45 4244.31,3877.45 4251.97,3885.1 J2.1 ; J2.1@4251.97,3901.57 J2.1@4267.72,3917.32
PVS: H3.15 U1.3 | length 281.6
  Top Layer w10: H3.15 4110.36,3137.67 4110.36,3088.62 4220.63,2978.35 U1.3
PXCLK_3V3: H3.17 U1.2 | length 194.7
  Top Layer w10: H3.17 4250,2998.03 U1.2
UART0_RX: J2.4 U1.45 | length 1591.3
  Top Layer w10: J2.4 4309.25,4006.1 4309.25,3997.83 v1(4322.83,3984.25) ; v1(4570.87,3440.94) v1(4665.35,3440.94) ; U1.45 4667.32,2958.66 4751.97,3043.31 v1(4787.4,3043.31)
  Bottom Layer w10: v1(4322.83,3984.25) 4322.83,3893.7 4386.14,3830.39 4386.14,3630.33 4570.87,3445.61 v1(4570.87,3440.94) ; v1(4665.35,3440.94) 4842.08,3264.22 4842.08,3235.69 4862.09,3215.68 4862.09,3159.62 4839.82,3137.36 4792.58,3137.36 4772.08,3116.85 4772.08,3087.86 4787.4,3072.53 v1(4787.4,3043.31) v1@4797.53,3043.31
UART0_TX: J1.4 U1.53 | length 1180.3
  Top Layer w10: J1.4@4377.24,4059.45 J1.4 4370.08,4058.74 4404.76,4024.06 4404.76,3937.03 4448.82,3892.98 v1(4448.82,3862.2) ; U1.53 4537.4,3198.82 4559.06,3220.47 v1(4559.06,3275.59)
  Bottom Layer w10: v1(4448.82,3862.2) 4432.76,3846.14 4432.76,3656.84 4625.98,3463.61 4625.98,3389.76 4559.06,3322.83 v1(4559.06,3275.59)
VCC_3V3: C2.2 C16.2 C17.2 C22.2 C32.2 L5.1 R1.2 R4.1 R6.2 R11.2 R25.2 U2.3 U2.7 U2.8 U6.4 U7.1 U7.3 | length 4550.6
  Top Layer w10: R1.2 R25.2 ; C2.2 3773.62,2740.16 C32.2 3739.17,2721.46 R25.2 ; v3@3799.21,2678.53 v3(3799.21,2677.17) R25.2 ; v3(3846.46,2834.65) 3846.46,2854.33 3866.14,2874.02 C22.2 ; R4.1@3992.13,2367.13 3928.15,2367.13 3896.65,2398.62 U2.8 U2.7 3943.5,2506.5 v3(3976.38,2539.37) 3993.5,2556.5 U2.3 ; C16.2 R4.1 ; v3(4114.17,3661.42) 4149.61,3661.42 4206.69,3718.5 U7.1 ; R11.2 4259.84,3632.87 U7.3 4259.61,3654.29 4274.91,3654.29 4293.85,3673.23 4293.85,3702.21 4277.56,3718.5 U7.1 ; R6.2 C17.2 4374.02,3763.78 4370.08,3759.84 ; v1(4468.5,3744.09) 4468.5,3655.51 L5.1 4433.07,3679.13 4433.07,3696.85 4370.08,3759.84 ; v1(5114.17,2881.89) 5173.03,2881.89 U6.4 ; U7.1 4290.35,3759.84 4370.08,3759.84
  Bottom Layer w10: v3(3976.38,2539.37) 3937.01,2539.37 v3(3799.21,2677.17) 3799.21,2681.1 3846.46,2728.35 v3(3846.46,2834.65) 3803.15,2877.95 3724.41,2877.95 3644.06,2958.31 3644.06,2993.58 3629.92,3007.71 3629.92,3261.29 4030.77,3662.14 4113.45,3662.14 v3(4114.17,3661.42) ; v1(4468.5,3744.09) 4491.81,3720.79 4491.81,3626.07 4493.71,3626.07 4643.83,3475.94 4679.85,3475.94 4700.35,3455.44 4700.35,3434.23 4862.08,3272.51 4862.08,3263.18 4979.59,3145.67 5009.55,3145.67 5016.99,3153.1 5045.98,3153.1 5066.49,3132.6 5066.49,3122.49 5106.3,3082.68 v1@5106.3,2881.89
VCC_BRD: C21.2 G1.3 G2.3 G3.3 G4.3 H2.1 H3.16 R5.1 S1.2 U6.1 U6.2 | length 7377.5
  Top Layer w10: G3.3 G4.3 3326.77,2998.03 G2.3 ; v3(3311.02,3062.99) 3322.83,3074.8 G2.3 ; G1.3 3596.46,3141.73 3543.31,3141.73 3531.5,3129.92 3531.5,3090.55 3515.75,3074.8 G2.3 ; v3@3988.19,3488.19 3984.25,3484.25 3893.7,3484.25 3725.83,3316.38 3703.16,3316.38 3611.19,3224.41 3555.12,3224.41 3405.51,3074.8 G2.3 ; v3(3988.18,3496.06) 3996.06,3496.06 4011.81,3511.81 4011.81,3673.23 4110.24,3771.65 4110.24,3808.54 4212.6,3910.9 4212.6,4074.8 4255.91,4118.11 4255.91,4251.97 4267.72,4263.78 4267.72,4322.83 H2.1 ; C21.2 5132.87,3137.8 5181.1,3137.8 5204.72,3114.17 5204.72,3096.17 5193.9,3085.35 U6.1 ; U6.2 U6.1 ; v1(5338.58,3003.94) 5338.58,3048.82 5342.52,3052.76 ; R5.1 5497.05,3031.5 5452.76,3031.5 5431.5,3052.76 5342.52,3052.76 ; U6.1 5342.52,3052.76
  Bottom Layer w10: v3(3311.02,3062.99) 3273.62,3025.59 3187.01,3025.59 3154.17,2992.76 3014.93,2992.76 2991.5,2969.32 2991.5,2936.19 3014.93,2912.76 3106.2,2912.76 3164.94,2854.02 3263.78,2854.02 3314.96,2802.83 3346.46,2802.83 3373.7,2775.59 3488.74,2775.59 3619.49,2644.84 3664.73,2644.84 4141.1,2168.47 4141.1,2081.86 4164.53,2058.43 4197.48,2058.43 4225.22,2030.68 4225.22,1931.3 S1.2 S1.2@4215.47,1931.3 ; v3(3988.18,3496.06) 4043.31,3496.06 4145.05,3394.32 H3.16 ; S1.2@4219.59,1932.19 4420.63,2133.23 4489.01,2133.23 4512.44,2156.66 4512.44,2232.91 4992.13,2712.6 5074.8,2795.28 5220.47,2795.28 5338.58,2913.39 v1(5338.58,3003.94)
VCC_DCDC_3V3: C7.1 C13.2 C28.2 C31.2 R2.2 R3.2 U1.47 U5.3 U5.8 U5.13 U7.4 | length 3220.5
  Top Layer w10: R3.2 3670.28,3181.1 3744.09,3181.1 ; v1(3761.81,3226.38) 3744.09,3208.66 3744.09,3181.1 ; U5.13 3753.94,3163.39 3744.09,3173.23 3744.09,3181.1 ; R2.2 v1(3862.2,3295.27) ; v1(3862.2,3295.27) 3866.13,3295.27 3874.02,3287.39 3874.02,3240.16 3881.89,3232.28 ; U5.8 3872.05,3222.44 3881.89,3232.28 ; U5.3 3944.88,3104.33 3956.69,3116.14 3956.69,3192.91 3917.32,3232.28 3881.89,3232.28 ; v1(4271.65,3429.13) 4295.28,3452.76 4295.28,3535.43 4318.9,3559.06 C28.2 C31.2 ; U7.4 4373.03,3643.7 4397.64,3619.09 C31.2 ; v1(4625.98,3622.05) 4598.43,3594.49 4561.54,3594.49 4526.11,3559.06 C31.2 ; U1.47 4667.32,2998.03 4736.22,3066.93 4758.16,3066.93 4769.54,3078.31 4783.03,3078.31 v1(4807.08,3102.36) 4862.2,3102.36 4870.07,3110.23 v1(4870.07,3118.1) ; v1(5031.49,3118.1) 5031.49,3173.24 5015.75,3188.98 v1(5015.75,3232.28) 5039.37,3208.66 5078.74,3208.66 5106.3,3181.1 5106.3,3172.24 C7.1
  Bottom Layer w10: v1(3761.81,3226.38) 3844.49,3226.38 3862.2,3244.09 v1(3862.2,3295.27) 3819.37,3338.1 3819.37,3394.17 3881.06,3455.87 3888.94,3455.87 3969.13,3536.06 4181.93,3536.06 4232.91,3485.07 4232.91,3464.57 4268.35,3429.13 v1(4271.65,3429.13) ; v1(4625.98,3622.05) v1(5015.75,3232.28) v1@5019.69,3228.35 ; v1(4870.07,3118.1) v1(5031.49,3118.1)
pads on no net: S1.3 U1.15 U1.18 U1.26 U1.27 U1.28 U1.46 U1.50 U1.62 U1.63 U5.2 U5.4 U5.5 U5.6 U5.7 U5.9 U5.12 U5.14 U5.16 U5.18 U5.19 U5.21 U5.22 U5.25
copper on no net:
  other v2: 3799.21,3070.87 3842.52,3070.87 3885.83,3070.87 3799.21,3114.17 3842.52,3114.17 3885.83,3114.17 3799.21,3157.48 3842.52,3157.48 3885.83,3157.48
  other v5: 4358.27,1814.96 4250.54,2110.93

## Silkscreen, mask and mechanical layers (free items; w line width, h text height)
Mechanical 1:
  the board outline again, w10

## Text inside footprints (layer, text, board x,y; h text height)
H3: Top Overlay "1" at 3803.52,3416.23 h39.37 r315; Top Overlay "17" at 4168.21,3051.54 h39.37 r315